# Altium PCB Main.PcbDoc
Units mm, origin at the board's own origin, x right, y up, seen from the top; angles counter-clockwise.
Board outline 100 x 45 mm, 2 copper layers (Top Layer, Bottom Layer); 36 components, 28 nets, 169 pads, 0 vias.
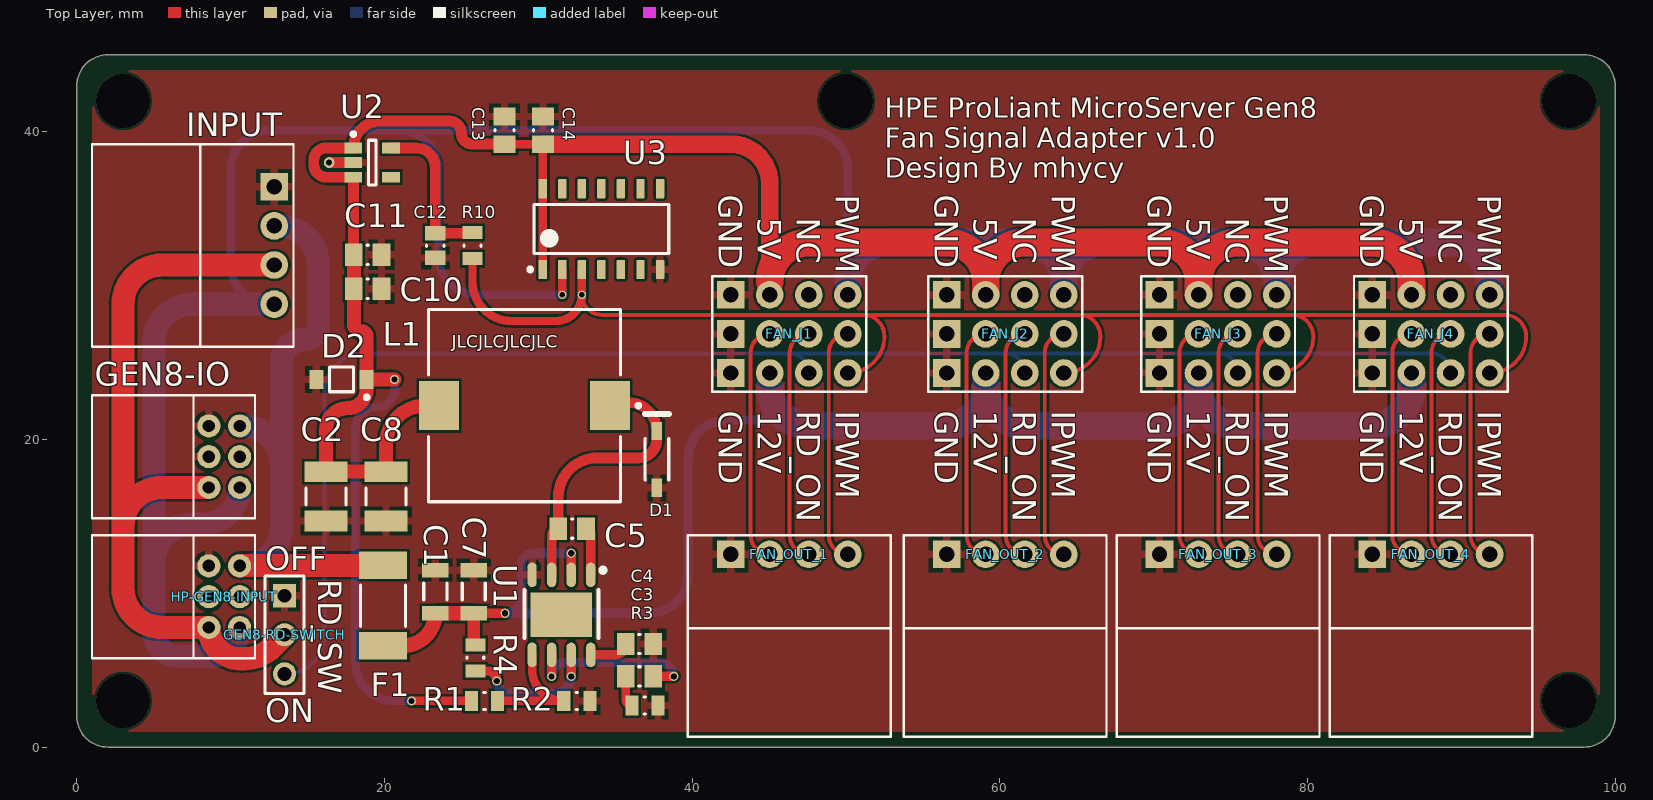
[diagram p0: Top Layer view]
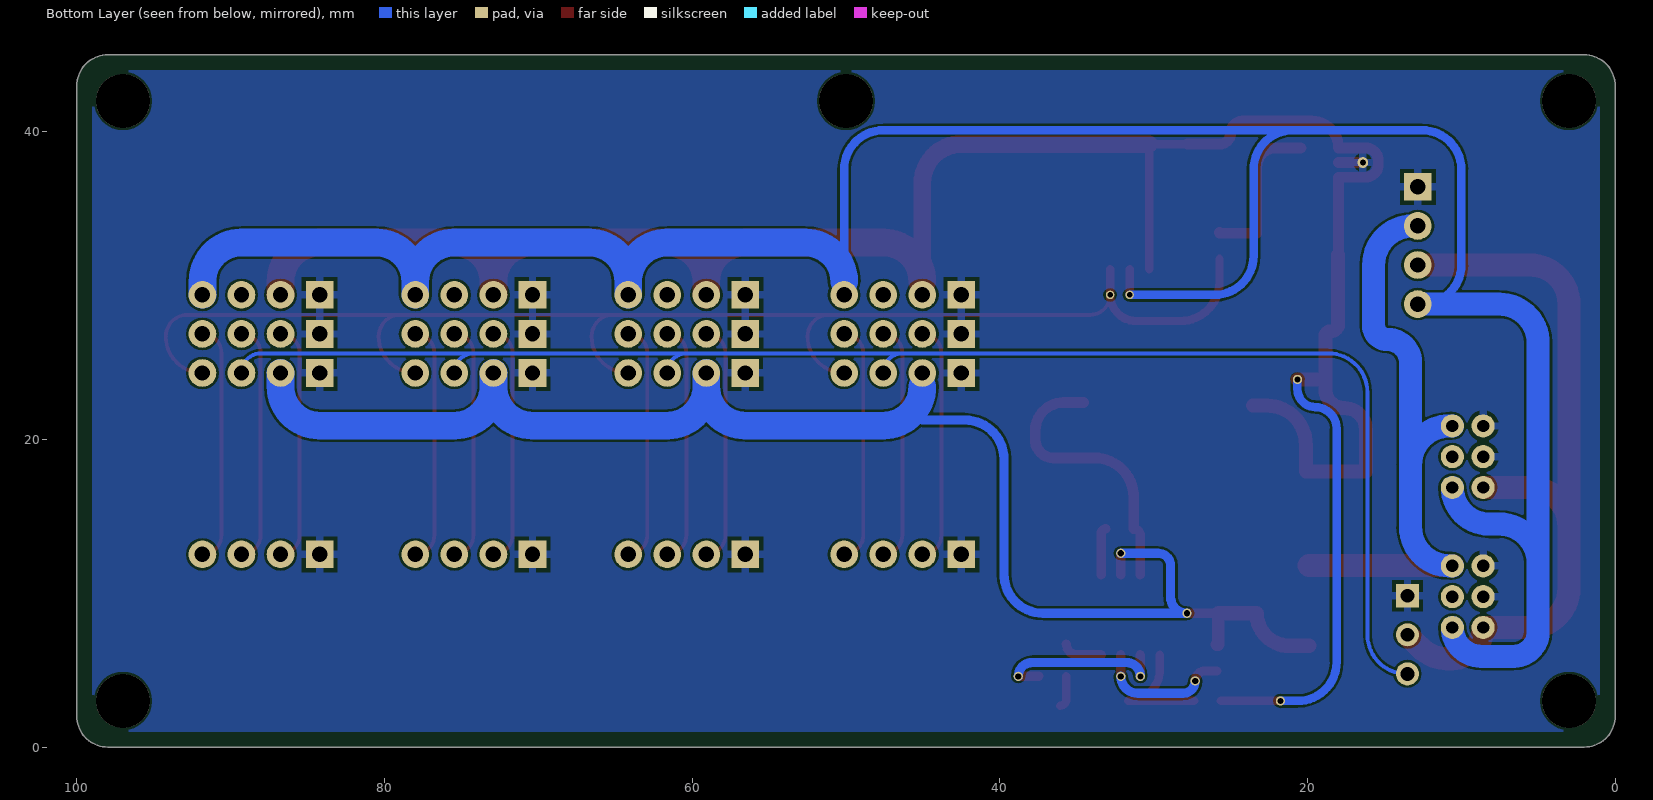
[diagram p1: Bottom Layer view, seen from below]

## Layer stack, top to bottom
Top Solder: solder mask 0.0102, Solder Resist, Dk 3.5
Top Layer: signal copper 0.0356
Dielectric 1: dielectric 0.32, FR-4, Dk 4.8
Bottom Layer: signal copper 0.0356
Bottom Solder: solder mask 0.0102, Solder Resist, Dk 3.5

## Board outline
0,2 0,43 cw(c2,43) 2,45 98,45 cw(c98,43) 100,43 100,2 cw(c98,2) 98,0 2,0 cw(c2,2)

## Design rules (kind name [scope] priority, off if disabled: settings)
Clearance [All] p1: gap=0.152 ignorepadtopadclearanceinfootprint=TRUE
HoleSize [All] p1 off: absolutevalues=TRUE maxlimit=2.54 minlimit=0.025 maxpercent=80.000 minpercent=20.000
HoleToHoleClearance [All] p1 off: gap=0.254 allowstackedmicrovias=TRUE
MinimumSolderMaskSliver [All] p1 off: minsoldermaskwidth=0.254
PolygonConnect [All] p1: connectstyle=Relief reliefconductorwidth=0.508 reliefentries=4 polygonreliefangle="90 Angle" airgapwidth=0.254
RoutingVias [All] p1: holewidth=0.711 width=1.27 viastyle="Through Hole" minholewidth=0.711 minwidth=1.27 maxholewidth=0.711 maxwidth=1.27
SilkToSilkClearance [All] p1 off: silktosilkclearance=0.254
SilkToSolderMaskClearance [IsPad] p1 off: minsilkscreentomaskgap=0.254 clearancetoexposedcopper=TRUE
SolderMaskExpansion [All] p1: expansion=0.102
Width [All] p1: maxlimit=10 minlimit=0.254 preferedwidth=0.254
25 further rules are at their usual default settings.

## Classes and differential pairs
component class Power: C1 C2 C3 C4 C5 C7 C8 C10 C11 C12 C13 C14 D1 D2 F1 L1 R1 R2 R3 R4 Text U1 U2
component class Main: FAN_J1 FAN_J2 FAN_J3 FAN_J4 FAN_OUT_1 FAN_OUT_2 FAN_OUT_3 FAN_OUT_4 GEN8-IO GEN8-RD-SWITCH HP-GEN8-INPUT INPUT R10 U3

## Components (designator, comment, footprint, x,y, rotation, side; value= is the part's Value field where it differs from the comment)
C1 "10uF" CAPC1206(3216)190_L 23.3,10.1 r270 top
C2 "22uF" CAPC1210(3225)250_M 16.2,16.3 r90 top
C3 "3.9nF 0805" CAPC0805(2012)145_N 36.575,4.6 r0 top value=3.9uF
C4 "0.1uF 0805" CAPC0805(2012)145_N 36.575,6.7 r180 top value=3.9uF
C5 "10nF 0805" CAPC0805(2012)145_N 32.2,14.2 r0 top value=3.9uF
C7 "10uF" CAPC1206(3216)190_L 25.8,10.1 r270 top
C8 "22uF" CAPC1210(3225)250_M 20.1,16.3 r90 top
C10 "10nF" CAPC0805(2012)100_N 18.9,29.8 r180 top
C11 "1nF" CAPC0805(2012)100_N 18.9,32 r180 top value=10nF
C12 "1uF" CAPC0805(2012)100_L 23.3,32.6 r90 top value=10nF
C13 "10nF" CAPC0805(2012)100_N 27.8,40.1 r270 top
C14 "1nF" CAPC0805(2012)100_N 30.3,40.1 r270 top value=10nF
D1 "B130" DIOD-SOD-123-2-A_V 37.7,18.7 r90 top
D2 "MMSZ5234BT1" ONSC-SOD-123-2-425-04_V 17.2,23.9 r180 top
F1 "2A 16V" LFUS-1812L16012_V 19.9,9.2 r270 top
FAN_J1 "FAN_JUMP" FAN_JUMP 42.5,24.32 r90 top locked
FAN_J2 "FAN_JUMP" FAN_JUMP 56.54,24.32 r90 top locked
FAN_J3 "FAN_JUMP" FAN_JUMP 70.38,24.32 r90 top locked
FAN_J4 "FAN_JUMP" FAN_JUMP 84.22,24.32 r90 top
FAN_OUT_1 "" 2510-PWM-4PIN 42.5,12.53 r0 top
FAN_OUT_2 "" 2510-PWM-4PIN 56.54,12.53 r0 top
FAN_OUT_3 "" 2510-PWM-4PIN 70.38,12.53 r0 top
FAN_OUT_4 "" 2510-PWM-4PIN 84.22,12.53 r0 top
GEN8-IO "HP-PHD-2*3-FANS" PHD-2*3AW 10.58,20.88 r270 top (schematic designator HP-GEN8-OUTPUT)
GEN8-RD-SWITCH "Header 3" HDR1X3 13.5,9.84 r270 top
HP-GEN8-INPUT "HP-PHD-2*3-FANS" PHD-2*3AW 10.58,11.78 r270 top
INPUT "2510-PWM-4P" 2510-PWM-4PIN 12.83,36.42 r270 top (schematic designator FAN_INPUT)
L1 "SLF12575-10uH" TDK-SLF12575-H_V 29.1,22.2 r180 top
R1 "44.2K 1%" RESC0805(2012)_L 26.5,3 r0 top value="100000.00 Ohm"
R2 "10K 1%" RESC0805(2012)_L 32.5,3 r180 top value="100000.00 Ohm"
R3 "6.8K 1%" RESC0805(2012)_L 36.925,2.7 r180 top value="100000.00 Ohm"
R4 "100K 1%" RESC0805(2012)_L 25.9,5.8 r270 top value="100000.00 Ohm"
R10 "4.7K 1%" RESC0805(2012)_L 25.72,32.6 r90 top value="100000.00 Ohm"
U1 "MP2703" LC-SOP-8_EP_150mil 31.5,8.6 r180 top
U2 "ADP151AUJZ-3.3-R7" ADI-UJ-5_M 19.2,38 r0 top
U3 "CD74HCT03M" D0014A_L 34.1,33.675 r90 top

## Footprints (in the part's own frame and the unit in brackets; to place one, negate y for a bottom-side part, rotate by r counter-clockwise, add the part's x,y. Pads: shape width x height; smd on the part's side, far side on the other; paste and mask are expansions set on the pad)
2510-PWM-4PIN [mm]
  rect 1.8x1.8 hole 1: 1(0,0)
  round 1.8 hole 1: 2(2.54,0) 3(5.08,0) 4(7.62,0)
  silkscreen extent -2.78,-11.85 10.4,1.25
ADI-UJ-5_M [mm] "SOT23, 5-Leads, Body 2.9x1.6mm, Pitch 0.95mm, IPC Low Density"
  rect 1.15x0.7 smd: 1(-1.225,0.95) 2(-1.225,0) 3(-1.225,-0.95) 4(1.225,-0.95) 5(1.225,0.95)
  silkscreen extent -1.35,-1.45 0.25,1.97, body extent -0.8,-1.45 0.8,1.45, height 1
CAPC0805(2012)100_L [mm] "Chip Capacitor, Body 2.0x1.2mm, Height 1.0mm, IPC High Density"
  rect 0.95x1.35 smd: 1(-0.8,0) 2(0.8,0)
  silkscreen extent -0.05,-0.58 0.05,0.58, body extent -1.1,-0.72 1.1,0.72, height 1
CAPC0805(2012)100_N [mm] "Chip Capacitor, Body 2.0x1.2mm, Height 1.0mm, IPC Medium Density"
  rect 1.15x1.45 smd: 1(-0.9,0) 2(0.9,0)
  silkscreen extent -0.05,-0.62 0.05,0.63, body extent -1.1,-0.72 1.1,0.73, height 1
CAPC0805(2012)145_N [mm] "Chip Capacitor, Body 2.0x1.2mm, Height 1.45mm, IPC Medium Density"
  rect 1.15x1.45 smd: 1(-0.9,0) 2(0.9,0)
  silkscreen extent -0.05,-0.62 0.05,0.63, body extent -1.1,-0.72 1.1,0.73, height 1.45
CAPC1206(3216)190_L [mm] "Chip Capacitor, Body 3.2x1.6mm, Height 1.9mm, IPC High Density"
  rect 0.95x1.7 smd: 1(-1.4,0) 2(1.4,0)
  silkscreen extent -0.55,-0.75 0.55,0.75, body extent -1.7,-0.9 1.7,0.9, height 1.9
CAPC1210(3225)250_M [mm] "Chip Capacitor, Body 3.2x2.5mm, Height 2.5mm, IPC Low Density"
  rect 1.35x2.8 smd: 1(-1.6,0) 2(1.6,0)
  silkscreen extent -0.55,-1.3 0.55,1.3, body extent -1.7,-1.35 1.7,1.35, height 2.5
D0014A_L [mm] "SOIC, 14-Leads, Body 8.75x4mm, Pitch 1.27mm, IPC High Density"
  rrect18% 1.25x0.55 smd: 1(-2.625,3.81) 2(-2.625,2.54) 3(-2.625,1.27) 4(-2.625,0) 5(-2.625,-1.27) 6(-2.625,-2.54) 7(-2.625,-3.81) 8(2.625,-3.81) 9(2.625,-2.54) 10(2.625,-1.27) 11(2.625,0) 12(2.625,1.27) 13(2.625,2.54) 14(2.625,3.81)
  silkscreen extent -2.75,-4.38 1.6,4.76, body extent -3.02,-4.32 3.02,4.32, height 1.59
DIOD-SOD-123-2-A_V [mm] "SOD-123, 2-Leads, Body 2.7x1.55mm"
  rect 1.2x0.7 smd paste+0: 1(-1.85,0) 2(1.85,0)
  silkscreen extent -1.35,-0.77 2.95,0.77, body extent -1.35,-0.77 1.35,0.77, height 1.45
FAN_JUMP [mm]
  rect 1.8x1.8 hole 1: 1(5.08,0) 5(2.54,0) 9(0,0)
  round 1.8 hole 1: 2(5.08,-2.54) 3(5.08,-5.08) 4(5.08,-7.62) 6(2.54,-2.54) 7(2.54,-5.08) 8(2.54,-7.62) 10(0,-2.54) 11(0,-5.08) 12(0,-7.62)
  silkscreen extent -1.21,-8.81 6.29,1.19
HDR1X3 [mm] "Connector; Header; 3 Position"
  rect 1.5x1.5 hole 0.9: 1(0,0)
  round 1.5 hole 0.9: 2(2.54,0) 3(5.08,0)
  silkscreen extent -1.27,-1.27 6.35,1.27
LC-SOP-8_EP_150mil [mm]
  rect 4x2.9 smd: 0(0,0)
  oval 0.6x1.6 smd: 1(-1.905,-2.6) 2(-0.635,-2.6) 3(0.635,-2.6) 4(1.905,-2.6) 5(1.905,2.6) 6(0.635,2.6) 7(-0.635,2.6) 8(-1.905,2.6)
  silkscreen extent -2.85,-3.05 2.4,1.5
LFUS-1812L16012_V [mm] "Chip Fuse, 2-Leads, Body 4.73x3.41mm"
  rect 1.78x3.15 smd: 1(-2.615,0) 2(2.615,0)
  silkscreen extent -1.35,-1.47 1.35,1.48, body extent -2.36,-1.7 2.36,1.7, height 1.25
ONSC-SOD-123-2-425-04_V [mm] "SOD, 2-Leads, Body 2.69x1.6mm"
  rect 0.91x1.22 smd: 1(-1.635,0) 2(1.635,0)
  silkscreen extent -1.76,-0.8 0.78,1.28, body extent -1.35,-0.8 1.35,0.8, height 1.35
PHD-2*3AW [mm]
  round 1.5 hole 0.8: 1(0,0) 2(2,0) 3(4,0) 4(4,-2) 5(2,-2) 6(0,-2)
  silkscreen extent -2,-9.6 6,1
RESC0805(2012)_L [mm] "Chip Resistor, Body 2.0x1.3mm, IPC High Density"
  rect 0.85x1.3 smd: 1(-0.85,0) 2(0.85,0)
  silkscreen extent -0.05,-0.55 0.05,0.55, body extent -1.1,-0.67 1.1,0.68, height 0.7
TDK-SLF12575-H_V [mm] "SMD, 2-Leads, Body 12.5x12.5mm"
  rect 2.6x3.2 smd: 1(-5.55,0) 2(5.55,0)
  silkscreen extent -7.53,-6.25 6.25,6.25, body extent -6.25,-6.25 6.25,6.25, height 8.85

## Part data
C1 C7: library part CMP-1037-04979-1, "CAP 10uF 25V ±10% 1206 (3216 Metric) Thickness 1.9mm SMD", Case-EIA=1206, Case-Metric=3216, Rated Voltage="25 V", Tolerance=?±10%, Max Thickness="1.9 mm", Technology=SMT
C2 C8: library part CMP-1038-02267-1, "CAP 22uF 10V ±10% 1210 (3225 Metric) Thickness 2.5mm SMD", Case-EIA=1210, Case-Metric=3225, Rated Voltage="10 V", Tolerance=?±10%, Max Thickness="2.5 mm", Technology=SMT
C3 C4 C5: library part CMP-1036-04874-1, "CAP 3.9uF 10V ±10% 0805 (2012 Metric) Thickness 1.45mm SMD", Case-EIA=0805, Case-Metric=2012, Rated Voltage="10 V", Tolerance=?±10%, Max Thickness="1.45 mm", Technology=SMT
C10 C11 C12 C13 C14: library part CMP-1036-03820-1, "CAP 10nF 16V ±10% 0805 (2012 Metric) Thickness 1mm SMD", Case-EIA=0805, Case-Metric=2012, Rated Voltage="16 V", Tolerance=?±10%, Max Thickness="1 mm", Technology=SMT
D1: library part CMP-2000-05884-1, "Schottky Barrier Rectifier, 30 V, 1 A, -55 to 125 degC, 2-Pin SMD, RoHS, Tape and Reel", If - Forward Current=1A, Ifsm - Forward Surge Current=12A, Ir - Reverse Current=1000uA, Manufacturer=DiodesIncorporated, Maximum Operating Temperature=+125C, Minimum Operating Temperature=-55C, Operating Temperature Range=-55Cto+125C, Package / Case=SOD-123, Package Description="2-Pin Small Outline Diode, Body 2.7 x 1.55 mm", Package Reference=SOD-123-2, Vf - Forward Voltage=0.42V, Vrrm - Repetitive Reverse Voltage=30V, Brand=DiodesIncorporated, Configuration=Single, Datasheet URL=http://www.diodes.com/_files/datasheets/ds30308.pdf, Datasheet Version="Rev. 9-2, 06/2008", Factory Pack Quantity=3000, Height=1.25mm, Length=2.85mm, Manufacturer URL=http://www.diodes.com/, Mounting Style=SMD/SMT, Mounting Technology=SurfaceMount, Packaging=Reel, Product=SchottkyDiodes, Product Category=SchottkyDiodes&Rectifiers, RoHS=True, Series=B130, Technology=Si, Termination Style=SMD/SMT, Type=SchottkyBarrierRectifier, Unit Weight=0.000353oz, Width=1.7mm
D2: library part CMP-1060-00360-1, "Zener Voltage Regulator, 500 mW, 2-Pin SOD-123, Tape and Reel", Manufacturer="On Semiconductor", ComponentLink1Description="Manufacturer URL", ComponentLink1URL=http://www.onsemi.com/, ComponentLink2Description=Datasheet, ComponentLink2URL=http://www.onsemi.com/pub_link/Collateral/MMSZ5221BT1-D.PDF, ComponentLink3Description="Package Specification", ComponentLink3URL=http://www.onsemi.com/pub_link/Collateral/425-04.PDF, DatasheetVersion="Rev. 12", Mounting Technology="Surface Mount", PackageDescription="2-Pin SOD, Body 1.6 x 2.69 mm", PackageReference=SOD-123-2-425-04, PackageVersion="Rev. G, 10/2009", Packing="Tape and Reel", PartNumber=MMSZ5234BT1, P Max (W)=0.5, VZ Typ (V)=6.2
F1: library part CMP-1700-00005-1, "POLY-FUSE(R) Resettable PTC, 1.6 A, -40 to 85 degC, 1812 (4532 Metric), RoHS, Tape and Reel", Max Operating Temperature="150 degC", Min Operating Temperature="-55 degC", Package Quantity=50, Power Rating="500 mW", Resistance="10 kohm", Tolerance=10%, Voltage Rating="300 V", ComponentLink1Description="Manufacturer URL", ComponentLink1URL=http://www.littelfuse.com/, ComponentLink2Description=Datasheet, ComponentLink2URL=http://www.littelfuse.com/~/media/electronics/datasheets/resettable_ptcs/littelfuse_ptc_1812l_datasheet.pdf.pdf, DatasheetVersion=Feb-16, Height="0.25 inch", Length="9.53 mm", Mount="Through Hole", PackageDescription="2-Pin Surface Mount Device, Body 4.55 x 3.24 mm", PackageReference=1812, Packaging=Rail/Tube, Radiation Hardening=No, REACH SVHC="No SVHC", RoHSCompliant=true, Voltage Rating (DC)="300 V", Weight="0.03 oz", Width="9.53 mm"
FAN_OUT_1 FAN_OUT_2 FAN_OUT_3 FAN_OUT_4: library part 2510-PWM-4P
GEN8-RD-SWITCH: "Header, 3-Pin", LatestRevisionDate=17-Jul-2002, LatestRevisionNote="Re-released for DXP Platform.", Publisher="Altium Limited"
L1: library part CMP-1663-00003-4, "Power Inductor, 33 uH, +/-20%, -40 to 125 degC,2-Pin SMD, RoHS, Tape and Reel", Current Rating="3.2 A", Manufacturer=TDK, Max Operating Temperature="105 ?C", Min Operating Temperature="-40 ?C", Package Quantity=500, ComponentLink1Description="Manufacturer URL", ComponentLink1URL=http://www.tdk.com/, ComponentLink2Description=Datasheet, ComponentLink2URL="http://media.digikey.com/pdf/Data Sheets/TDK PDFs/SLF12575 Series Type H.pdf", DatasheetVersion=03/2015, Height="7.5 mm", Length="12.5 mm", Mount="Surface Mount", Mounting Technology="Surface Mount", PackageDescription="2-Pin Surface Mount Device, Body 12.5 x 12.5 mm", PackageReference=SLF12575-H, Packaging="Tape and Reel", REACH SVHC="No SVHC", RoHSCompliant=True
R1 R2 R3 R4 R10: library part CMP-1013-00736-1, Case-EIA=0805, Case-Metric=2012, Power="0.125 W", Tolerance="1 %", Technology=SMT
U1: library part MP2307, "MP2307 – 3A, 23V, 340KHz SYNCHRONOUS RECTIFIED STEP-DOWN CONVERTER"
U2: library part CMP-0786-00387-1, "Ultralow Noise, 200 mA, CMOS Linear Regulator, 2.2 to 5.5 V Vin, 3.3 V Vout, Industrial, 5-pin SOT23 (UJ-5), Reel", Manufacturer="Analog Devices", Preset Vout Values (V)=3.3, Supply Current IGND @ Small Load=10uA, Code_JEDEC=MO-193-AB, ComponentLink1Description="Manufacturer URL", ComponentLink1URL=http://www.analog.com/en/index.html, ComponentLink2Description=Datasheet, ComponentLink2URL=http://www.analog.com/static/imported-files/data_sheets/ADP151.pdf, ComponentLink3Description="Package Specification", ComponentLink3URL=http:/www.analog.com/static/imported-files/packages/PKG_PDF/TSOT(UJ)/UJ_5.pdf, ComponentLink4Description="URL Link1", ComponentLink4URL="Product URL:http://www.analog.com/en/ADP151/productSearch.html", DatasheetVersion="Rev. E", Iout max=200mA, Mounting Technology="Surface Mount", PackageDescription="5-Pin Thin Small Outline Transistor Package, Body 2.9 x 1.6 mm, Pitch 0.95 mm", PackageReference=UJ-5, PackageVersion="100708-A, 10/2008", Packing=Reel, PartNumber=ADP151AUJZ-3.3-R7, Vin (max) (V)=5.5, Vin (min) (V)=2.2
U3: library part CMP-1627-00022-2, "High Speed CMOS Logic Quad 2-Input NAND Gates with Open Drain, D0014A, TUBE", F @ Nom Voltage(Max)(Mhz)=25, Generic Part Number=CD74HCT03, ICC @ Nom Voltage(Max)(mA)=0.02, Manufacturer="Texas Instruments", Operating Temperature Range(C)="-55 to 125", Rating=Catalog, tpd @ Nom Voltage(Max)(ns)=30, Voltage(Nom)(V)=5, Bits(#)=4, Code_JEDEC=MS-012, DatasheetVersion=SCHS126D, Input Type=TTL, Output Drive (IOL/IOH)(Max)(mA)=0/4, Output Type=CMOS, PackageReference=D0014A, PartId=1, Schmitt Trigger=No, Technology Family=HCT, VCC(Max)(V)=5.5, VCC(Min)(V)=4.5

## Free pads (board coordinates)
  round 3.5 hole 3.5 unplated: 6(3,3) 6(3,42) 6(50,42) 6(97,3) 6(97,42)
  round 0.6 hole 0.4: 7(20.65,23.9) 7(21.76,3) 7(27.3,4.3) 7(27.835,8.7) 7(30.865,4.6) 7(32.135,4.6) 7(32.135,12.6) 7(38.8,4.6)
  round 0.55 hole 0.35: 8(31.56,29.4) 8(32.83,29.4)
  round 0.7 hole 0.4: 9(16.4,38)

## Nets (pads, with @x,y where several pads share a name; then routed paths per layer and width w, separated by ;. In a path a pad name is that pad's centre, name@x,y a point inside that pad or via, vN(x,y) a via of type N, cw(c..) or ccw(c..) an arc to the next point about the centre after c; other vN are vias at no path point)
DC_3.3V: C12.2 R10.2 U2.5 | length 10.1
  Top Layer w0.7: U2.5 22.05,38.95 cw(c22.05,37.7) 23.3,37.7 C12.2@23.3,33.6 ; C12.2 25.67,33.4 ccw(c25.67,33.45) R10.2
DC_5V: C2.2 C8.2 C10.2 C11.2 C13.2 C14.2 D2.1 FAN_J1.2 FAN_J2.2 FAN_J3.2 FAN_J4.2 L1.2 pad.7@20.65,23.9 pad.7@21.76,3 R1.1 U2.1 U2.3 U3.1 U3.14 | length 167.5
  Top Layer w0.55: pad.7@21.76,3 R1.1 ; C13.2 C14.2@30.29,39.2 ; U3.1 U3.14 C14.2@30.29,39.2 ; C14.2 C14.2@30.29,39.2
  Top Layer w0.7: C11.2 cw(c18,32.025) 17.975,32.025 U2.3 16.2,37.05 cw(c16.2,37.85) 15.4,37.85 15.4,38.15 cw(c16.2,38.15) 16.2,38.95 U2.1 cw(c19.725,38.95) 19.725,40.7 24.2,40.7 cw(c24.2,39.9) 25,39.9 ccw(c25.7,39.9) 25.7,39.2 C13.2
  Top Layer w0.91: C11.2 C10.2 18,27.54 ccw(c18.52,27.54) 18.52,27.02 cw(c18.52,26.705) 18.835,26.705 D2.1 ; pad.7@20.65,23.9 D2.1 ; L1.2 22.64,22.2 ccw(c22.64,19.66) 20.1,19.66 C8.2 C2.2 16.2,20.65 cw(c17.59,20.65) 17.59,22.04 ccw(c17.59,23.285) 18.835,23.285 D2.1
  Top Layer w1.15: C14.2 42.5,39.2 cw(c42.5,36.66) 45.04,36.66 45.04,30.26 FAN_J1.2
  Top Layer w1.8: FAN_J1.2@45.04,30.26 cw(c47.58,30.26) 47.58,32.8 56.54,32.8 cw(c56.54,30.26) FAN_J2.2@59.08,30.26 ; FAN_J2.2 FAN_J2.2@59.08,30.26 ; FAN_J3.2 FAN_J3.2@72.92,30.26 ; FAN_J4.2 86.76,30.26 ccw(c84.22,30.26) 84.22,32.8 75.46,32.8 ccw(c75.46,30.26) FAN_J3.2@72.92,30.26 ; FAN_J2.2@59.08,30.26 cw(c61.62,30.26) 61.62,32.8 70.38,32.8 cw(c70.38,30.26) FAN_J3.2@72.92,30.26
  Bottom Layer w0.55: pad.7@20.64,23.9 20.65,23.9 20.65,23.26 cw(c19.49,23.26) 19.49,22.1 ccw(c19.49,20.71) 18.1,20.71 18.1,5.54 ccw(c20.64,5.54) 20.64,3 pad.7@21.76,3 ; pad.7@21.755,3.004 pad.7@21.76,3.01
DC_12V: C1.2 C7.2 F1.2 FAN_J1.10 FAN_J2.10 FAN_J3.10 FAN_J4.10 pad.7@27.835,8.7 pad.7@32.135,12.6 R4.1 U1.2 | length 103.8
  Top Layer w0.6: C7.2 pad.7@27.835,8.7 ; U1.2 pad.7@32.135,12.6
  Top Layer w0.8: C7.2 25.8,6.65 R4.1
  Top Layer w0.95: F1.2 21.185,6.585 ccw(c21.185,8.7) C1.2 C7.2
  Bottom Layer w0.6: pad.7@32.135,12.6 29.7,12.6 ccw(c29.7,11.8) 28.9,11.8 28.9,9.765 cw(c27.835,9.765) 27.835,8.7 37.19,8.7 ccw(c37.19,11.24) 39.73,11.24 39.73,18.72 cw(c42.27,18.72) 42.27,21.26 45.04,21.26 45.04,23.44 FAN_J1.10
  Bottom Layer w1.8: FAN_J1.10@45.04,23.44 ccw(c47.58,23.44) 47.58,20.9 56.54,20.9 ccw(c56.54,23.44) FAN_J2.10@59.08,23.44 ; FAN_J2.10 FAN_J2.10@59.08,23.44 ; FAN_J3.10 FAN_J3.10@72.92,23.44 ; FAN_J4.10 86.76,23.44 cw(c84.22,23.44) 84.22,20.9 75.46,20.9 cw(c75.46,23.44) FAN_J3.10@72.92,23.44 ; FAN_J2.10@59.08,23.44 ccw(c61.62,23.44) 61.62,20.9 70.38,20.9 ccw(c70.38,23.44) FAN_J3.10@72.92,23.44
GEN8_PWM: FAN_J1.4 FAN_J2.4 FAN_J3.4 FAN_J4.4 GEN8-IO.3 HP-GEN8-INPUT.3 INPUT.4 pad.8@31.56,29.4 U3.2 | length 179.2
  Top Layer w0.55: pad.8@31.56,29.4 U3.2
  Bottom Layer w0.55: INPUT.4 12.54,28.8 cw(c12.54,31.34) 10,31.34 10,37.56 cw(c12.54,37.56) 12.54,40.1 20.96,40.1 ; pad.8@31.56,29.4 26.04,29.4 cw(c26.04,31.94) 23.5,31.94 23.5,37.56 ccw(c20.96,37.56) 20.96,40.1 ; FAN_J1.4 50.12,30.26 50.12,37.56 ccw(c47.58,37.56) 47.58,40.1 20.96,40.1
  Bottom Layer w1.5: HP-GEN8-INPUT.3 cw(c8.7,7.78) 8.7,5.9 6.6,5.9 cw(c6.6,7.5) 5,7.5 5,11.96 ; GEN8-IO.3 cw(c8.2,16.88) 8.2,14.5 7.54,14.5 ccw(c7.54,11.96) 5,11.96 ; INPUT.4@12.54,28.8 7.54,28.8 ccw(c7.54,26.26) 5,26.26 5,11.96
  Bottom Layer w1.8: FAN_J1.4@50.12,30.26 cw(c52.66,30.26) 52.66,32.8 61.62,32.8 cw(c61.62,30.26) FAN_J2.4@64.16,30.26 ; FAN_J2.4 FAN_J2.4@64.16,30.26 ; FAN_J3.4 FAN_J3.4@78,30.26 ; FAN_J4.4 91.84,30.26 ccw(c89.3,30.26) 89.3,32.8 80.54,32.8 ccw(c80.54,30.26) FAN_J3.4@78,30.26 ; FAN_J2.4@64.16,30.26 cw(c66.7,30.26) 66.7,32.8 75.46,32.8 cw(c75.46,30.26) FAN_J3.4@78,30.26
GEN8_RD: GEN8-IO.4 GEN8-RD-SWITCH.2 HP-GEN8-INPUT.4 INPUT.3 | length 50.4
  Top Layer w1.5: GEN8-IO.4 5.54,16.88 ccw(c5.54,14.34) 3,14.34 ; INPUT.3 5.54,31.34 ccw(c5.54,28.8) 3,28.8 3,14.34 ; GEN8-RD-SWITCH.2 12.688,6.488 cw(c10.892,8.284) 10.892,5.744 10.616,5.744 cw(c10.616,7.78) HP-GEN8-INPUT.4 5.54,7.78 cw(c5.54,10.32) 4.135,8.204 cw(c5.54,10.32) 3,10.32 3,14.34
GEN8_RD_INPUT: FAN_J1.11 FAN_J2.11 FAN_J3.11 FAN_J4.11 GEN8-RD-SWITCH.3 | length 101.2
  Bottom Layer w0.254: GEN8-RD-SWITCH.3 13.56,4.76 ccw(c13.56,7.3) 16.1,7.3 16.1,23.06 cw(c18.64,23.06) 18.64,25.6 46.3,25.6 ; FAN_J1.11 ccw(c46.3,24.32) 46.3,25.6 ; FAN_J2.11 ccw(c60.34,24.32) 60.34,25.6 ; FAN_J3.11 ccw(c74.18,24.32) 74.18,25.6 ; FAN_J4.11 ccw(c88.02,24.32) 88.02,25.6 74.18,25.6 ; 46.3,25.6 60.34,25.6 ; 60.34,25.6 74.18,25.6
GND: C1.1 C2.1 C4.1 C7.1 C8.1 C10.1 C11.1 C12.1 C13.1 C14.1 D1.1 D2.2 FAN_J1.1 FAN_J1.5 FAN_J1.9 FAN_J2.1 FAN_J2.5 FAN_J2.9 FAN_J3.1 FAN_J3.5 FAN_J3.9 FAN_J4.1 FAN_J4.5 FAN_J4.9 FAN_OUT_1.1 FAN_OUT_2.1 FAN_OUT_3.1 FAN_OUT_4.1 GEN8-IO.5 GEN8-IO.6 GEN8-RD-SWITCH.1 HP-GEN8-INPUT.5 HP-GEN8-INPUT.6 INPUT.1 pad.9 R2.1 R3.1 U1.4 U2.2 U3.7 | length 1.6
  Top Layer w0.7: pad.9 U2.2
JUMP_PWM_1: FAN_J1.8 FAN_OUT_1.4 | length 15.7
  Top Layer w0.254: FAN_OUT_1.4 cw(c50.12,13.77) 48.88,13.77 48.88,25.62 cw(c50.12,25.62) FAN_J1.8
JUMP_PWM_2: FAN_J2.8 FAN_OUT_2.4 | length 15.7
  Top Layer w0.254: FAN_OUT_2.4 cw(c64.16,13.77) 62.92,13.77 62.92,25.62 cw(c64.16,25.62) FAN_J2.8
JUMP_PWM_3: FAN_J3.8 FAN_OUT_3.4 | length 15.7
  Top Layer w0.254: FAN_OUT_3.4 cw(c78,13.77) 76.76,13.77 76.76,25.62 cw(c78,25.62) FAN_J3.8
JUMP_PWM_4: FAN_J4.8 FAN_OUT_4.4 | length 15.7
  Top Layer w0.254: FAN_OUT_4.4 cw(c91.84,13.77) 90.6,13.77 90.6,25.62 cw(c91.84,25.62) FAN_J4.8
JUMP_RD_1: FAN_J1.7 FAN_OUT_1.3 | length 15.7
  Top Layer w0.254: FAN_OUT_1.3 cw(c47.58,13.77) 46.34,13.77 46.34,25.62 cw(c47.58,25.62) FAN_J1.7
JUMP_RD_2: FAN_J2.7 FAN_OUT_2.3 | length 15.7
  Top Layer w0.254: FAN_OUT_2.3 cw(c61.62,13.77) 60.38,13.77 60.38,25.62 cw(c61.62,25.62) FAN_J2.7
JUMP_RD_3: FAN_J3.7 FAN_OUT_3.3 | length 15.7
  Top Layer w0.254: FAN_OUT_3.3 cw(c75.46,13.77) 74.22,13.77 74.22,25.62 cw(c75.46,25.62) FAN_J3.7
JUMP_RD_4: FAN_J4.7 FAN_OUT_4.3 | length 15.7
  Top Layer w0.254: FAN_OUT_4.3 cw(c89.3,13.77) 88.06,13.77 88.06,25.62 cw(c89.3,25.62) FAN_J4.7
JUMP_VCC_1: FAN_J1.6 FAN_OUT_1.2 | length 15.7
  Top Layer w0.254: FAN_OUT_1.2 cw(c45.04,13.77) 43.8,13.77 43.8,25.62 cw(c45.04,25.62) FAN_J1.6
JUMP_VCC_2: FAN_J2.6 FAN_OUT_2.2 | length 15.7
  Top Layer w0.254: FAN_OUT_2.2 cw(c59.08,13.77) 57.84,13.77 57.84,25.62 cw(c59.08,25.62) FAN_J2.6
JUMP_VCC_3: FAN_J3.6 FAN_OUT_3.2 | length 15.7
  Top Layer w0.254: FAN_OUT_3.2 cw(c72.92,13.77) 71.68,13.77 71.68,25.62 cw(c72.92,25.62) FAN_J3.6
JUMP_VCC_4: FAN_J4.6 FAN_OUT_4.2 | length 15.7
  Top Layer w0.254: FAN_OUT_4.2 cw(c86.76,13.77) 85.52,13.77 85.52,25.62 cw(c86.76,25.62) FAN_J4.6
NetC3_1: C3.1 R3.2 | length 2.1
  Top Layer w0.55: C3.1 35.675,3.1 ccw(c36.075,3.1) R3.2
NetC3_2: C3.2 pad.7@30.865,4.6 pad.7@38.8,4.6 U1.6 | length 11.7
  Top Layer w0.6: pad.7@30.865,4.6 U1.6 ; C3.2 pad.7@38.8,4.6
  Bottom Layer w0.6: pad.7@30.865,4.6 cw(c31.765,4.6) 31.765,5.5 37.9,5.5 cw(c37.9,4.6) pad.7@38.8,4.6
NetC4_2: C4.2 U1.8 | length 2.7
  Top Layer w0.6: U1.8 34.975,6 ccw(c34.975,6.7) C4.2
NetC5_1: C5.1 D1.2 L1.1 U1.3 | length 18.6
  Top Layer w0.6: U1.3 30.865,13.765 cw(c31.3,13.765) C5.1
  Top Layer w0.7: C5.1 31.3,16.26 cw(c33.84,16.26) 33.84,18.8 36.5,18.8 ccw(c36.5,20) 37.7,20 D1.2 ccw(c35.85,20.55) 35.85,22.4 L1.1@34.55,22.4
NetC5_2: C5.2 U1.1 | length 3.2
  Top Layer w0.6: C5.2 cw(c33.1,13.895) 33.405,13.895 U1.1
NetR1_2: R1.2 R2.2 U1.5 | length 8.5
  Top Layer w0.55: R1.2 R2.2 cw(c31.65,5.055) 29.595,5.055 U1.5
NetR4_2: pad.7@27.3,4.3 pad.7@32.135,4.6 R4.2 U1.7 | length 9.1
  Top Layer w0.6: R4.2 26.65,4.95 cw(c26.65,4.3) pad.7@27.3,4.3 ; pad.7@32.135,4.6 U1.7
  Bottom Layer w0.6: pad.7@27.3,4.3 ccw(c28.1,4.3) 28.1,3.5 31.035,3.5 ccw(c31.035,4.6) pad.7@32.135,4.6
PWM_OUT_1: FAN_J1.12 FAN_J2.12 FAN_J3.12 FAN_J4.12 pad.8@32.83,29.4 R10.1 U3.3 | length 97.2
  Top Layer w0.254: pad.8@32.83,29.4 ccw(c34.13,29.4) 34.13,28.1 51.1,28.1 ; FAN_J1.12 ccw(c50.12,26.7) 52.5,26.7 ccw(c51.1,26.7) 51.1,28.1 ; FAN_J2.12 ccw(c64.16,26.7) 66.54,26.7 ccw(c65.14,26.7) 65.14,28.1 ; FAN_J3.12 ccw(c78,26.7) 80.38,26.7 ccw(c78.98,26.7) 78.98,28.1 ; FAN_J4.12 ccw(c91.84,26.7) 94.22,26.7 ccw(c92.82,26.7) 92.82,28.1 78.98,28.1 ; 51.1,28.1 65.14,28.1 ; 65.14,28.1 78.98,28.1
  Top Layer w0.55: R10.1 25.72,30.24 ccw(c28.26,30.24) 28.26,27.7 31.13,27.7 ccw(c31.13,29.4) 32.83,29.4 U3.3
SOURCE_12V: F1.1 GEN8-IO.1 HP-GEN8-INPUT.1 INPUT.2 | length 40.4
  Top Layer w1.5: HP-GEN8-INPUT.1 cw(c10.615,11.78) 10.615,11.815 F1.1
  Bottom Layer w1.5: HP-GEN8-INPUT.1 10.76,11.78 ccw(c10.76,14.32) 13.3,14.32 13.3,18.34 ; GEN8-IO.1 10.76,20.88 cw(c10.76,18.34) 13.3,18.34 ; INPUT.2 13.16,33.88 cw(c13.16,31.34) 15.7,31.34 15.7,27.4 cw(c14.8,27.4) 14.8,26.5 ccw(c14.8,25) 13.3,25 13.3,18.34
pads on no net: FAN_J1.3 FAN_J2.3 FAN_J3.3 FAN_J4.3 GEN8-IO.2 HP-GEN8-INPUT.2 U1.0 U2.4 U3.4 U3.5 U3.6 U3.8 U3.9 U3.10 U3.11 U3.12 U3.13

## Polygon pours and split planes (outlines as drawn)
GND on Bottom Layer "Top Layer-No Net1" (solid, remove dead copper, pour order 26): 1,2 1,43 cw(c2,43) 2,44 98,44 cw(c98,43) 99,43 99,2 cw(c98,2) 98,1 2,1 cw(c2,2)
GND on Top Layer "Top Layer-No Net" (solid, remove dead copper, pour order 28): 1,2 1,43 cw(c2,43) 2,44 98,44 cw(c98,43) 99,43 99,2 cw(c98,2) 98,1 2,1 cw(c2,2)

## Silkscreen, mask and mechanical layers (free items; w line width, h text height)
Top Overlay:
  text "HPE ProLiant MicroServer Gen8 / Fan Signal Adapter v1.0 / Design By mhycy" at 52.51,37 h1.3
  text "JLCJLCJLCJLC" at 24.36,25.96 h0.8
  text "OFF" at 12.245,11.5 h1.52
  text "RD_SW" at 15.7,10.9 h1.52 r270
  text "ON" at 12.245,1.6 h1.52
Mechanical 1:
  lines w0.152: 98,0 ccw(c98,2) 100,2 ; 98,0 2,0 cw(c2,2) 0,2 0,43 cw(c2,43) 2,45 98,45 cw(c98,43) 100,43 ; 98,0 98,0 ; 100,2 100,2 ; 100,2 100,2 ; 100,2 100,43 ; 100,43 100,43

## Text inside footprints (layer, text, board x,y; h text height)
FAN_J1: Top Overlay "PWM" at 49.344,35.92 h1.52 r270; Top Overlay "NC" at 46.804,34.396 h1.52 r270; Top Overlay "5V" at 44.264,34.396 h1.52 r270; Top Overlay "GND" at 41.724,35.92 h1.52 r270; Top Overlay "GND" at 41.724,21.867 h1.52 r270; Top Overlay "12V" at 44.264,21.867 h1.52 r270; Top Overlay "RD_ON" at 46.804,21.867 h1.52 r270; Top Overlay "IPWM" at 49.344,21.867 h1.52 r270
FAN_J2: Top Overlay "PWM" at 63.384,35.92 h1.52 r270; Top Overlay "NC" at 60.844,34.396 h1.52 r270; Top Overlay "5V" at 58.304,34.396 h1.52 r270; Top Overlay "GND" at 55.764,35.92 h1.52 r270; Top Overlay "GND" at 55.764,21.867 h1.52 r270; Top Overlay "12V" at 58.304,21.867 h1.52 r270; Top Overlay "RD_ON" at 60.844,21.867 h1.52 r270; Top Overlay "IPWM" at 63.384,21.867 h1.52 r270
FAN_J3: Top Overlay "PWM" at 77.224,35.92 h1.52 r270; Top Overlay "NC" at 74.684,34.396 h1.52 r270; Top Overlay "5V" at 72.144,34.396 h1.52 r270; Top Overlay "GND" at 69.604,35.92 h1.52 r270; Top Overlay "GND" at 69.604,21.867 h1.52 r270; Top Overlay "12V" at 72.144,21.867 h1.52 r270; Top Overlay "RD_ON" at 74.684,21.867 h1.52 r270; Top Overlay "IPWM" at 77.224,21.867 h1.52 r270
FAN_J4: Top Overlay "PWM" at 91.064,35.92 h1.52 r270; Top Overlay "NC" at 88.524,34.396 h1.52 r270; Top Overlay "5V" at 85.984,34.396 h1.52 r270; Top Overlay "GND" at 83.444,35.92 h1.52 r270; Top Overlay "GND" at 83.444,21.867 h1.52 r270; Top Overlay "12V" at 85.984,21.867 h1.52 r270; Top Overlay "RD_ON" at 88.524,21.867 h1.52 r270; Top Overlay "IPWM" at 91.064,21.867 h1.52 r270